# EAGLE board ATtiny RGB LED driver (EAGLE 7.3.0)
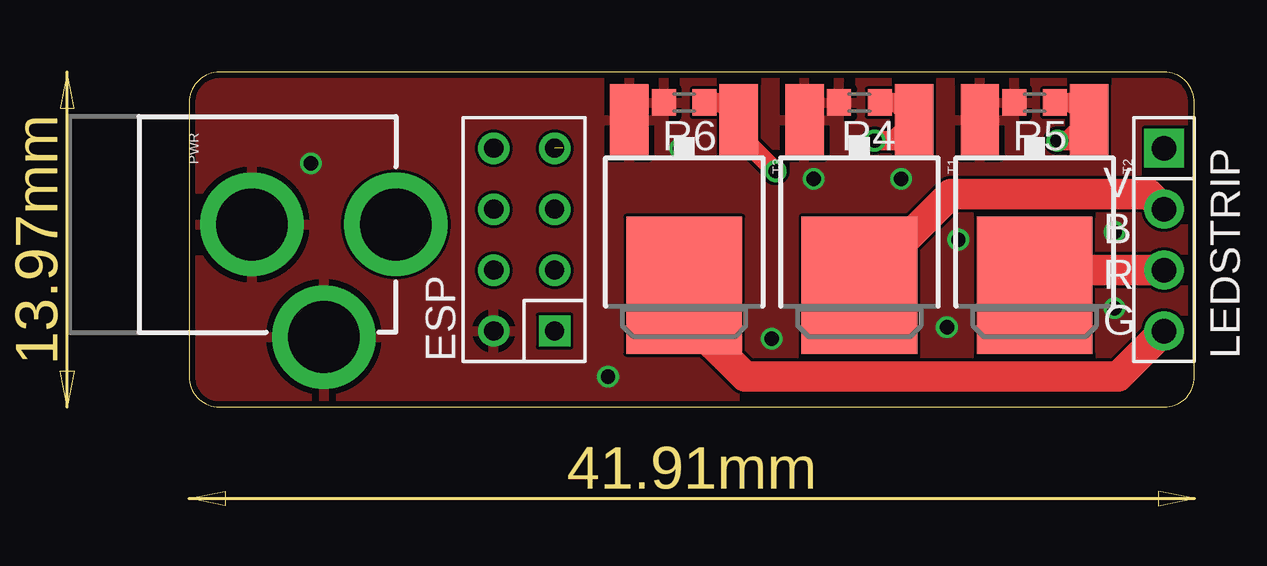
[diagram p0: board, top side]
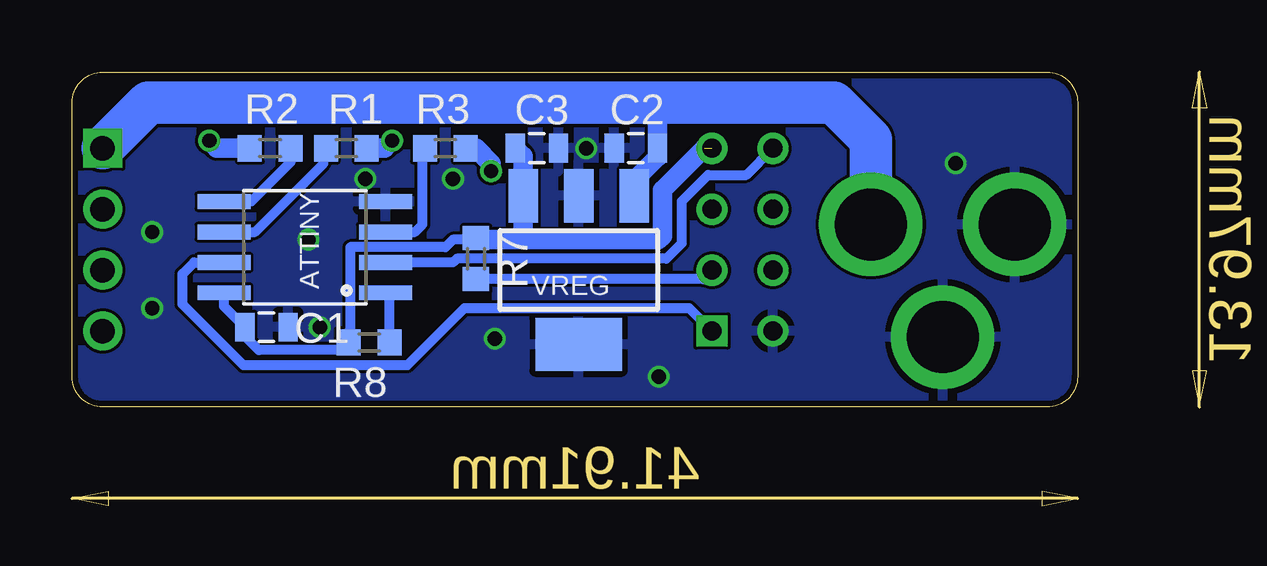
[diagram p1: board, bottom side, seen from below]

Size 41.91 x 13.97 mm. Coordinates in mm from the lower left corner, seen from the top.
Outline: 0,12.7 0,1.27 arc90 1.27,0 40.64,0 arc90 41.91,1.27 41.91,12.7 arc90 40.64,13.97 1.27,13.97 arc90 0,12.7
Copper layers (1*16): Top 0.035mm / dielectric 1.5mm / Bottom 0.035mm
Design rules "dirt_cheap_dirty_boards.v1": minimum track width 5mil, minimum drill 12mil, track to track 5mil, track to pad 5mil, pad to pad 5mil, via to via 5mil, smd to smd 0mil, copper to edge 10mil, drill to drill 10mil, minimum pad ring 10mil, minimum via ring 6mil, stop-mask expansion 2mil, vias tented up to drill 25mil, thermal gap 10mil

## Footprints (pad centres in the part's own frame; a part is rotated, then mirrored left to right if it is on the bottom)
SO08-EIAJ = smd 0.61 x 2.21: 1 -1.905,-3.378; 2 -0.635,-3.378; 3 0.635,-3.378; 4 1.905,-3.378; 5 1.905,3.353; 6 0.635,3.353; 7 -0.635,3.353; 8 -1.905,3.353
0805 = smd 0.8 x 1.2: 1 -0.9,0; 2 0.9,0
M2X4 = drill 0.8 square: 1 -3.81,-1.27 | drill 0.8: 2 -3.81,1.27; 3 -1.27,-1.27; 4 -1.27,1.27; 5 1.27,-1.27; 6 1.27,1.27; 7 3.81,-1.27; 8 3.81,1.27
M1X4 = drill 1.02 pad 1.632 square: 1 0,0 | drill 1.02 pad 1.632: 2 2.54,0; 3 5.08,0; 4 7.62,0
POWER_JACK_PTH = drill 2.997 pad 4.318: GND 0,7.7; GNDBREAK 4.7,10.7; PWR 0,13.7
R603 = smd 1 x 1.1: 1 -0.85,0; 2 0.85,0
DPAK = smd 1.6 x 3: 1 -2.28,-5.31; 3 2.28,-5.31 | smd 4.826 x 5.715: 4 0,1.588
SOT223 = smd 1.219 x 2.235: 1 -2.311,-3.099; 2 0,-3.099; 3 2.311,-3.099 | smd 3.6 x 2.2: 4 0,3.099

## Placement (x,y rotation side)
ATTINY  [SO08-EIAJ]  32.23,6.67 90 bottom
C1  100nF  [0805]  33.81,3.33 180 bottom
C2  10uF  [0805]  18.41,10.79 180 bottom
C3  10uF  [0805]  22.54,10.79 0 bottom
ESP  CON_HEADER_2X04-PTH  [M2X4]  13.97,6.99 90 top
LEDSTRIP  12vBRG  [M1X4]  40.64,10.79 270 top
PWR  [POWER_JACK_PTH]  -5.08,7.62 270 top
R1  1k  [R603]  30.48,10.79 0 bottom
R2  1k  [R603]  33.66,10.79 180 bottom
R3  1k  [R603]  26.35,10.79 0 bottom
R4  [R603]  27.94,12.7 0 top
R5  [R603]  35.24,12.7 0 top
R6  [R603]  20.64,12.7 0 top
R7  10k  [R603]  25.08,6.19 90 bottom
R8  10k  [R603]  29.53,2.7 180 bottom
T1  [DPAK]  27.94,6.67 180 top
T2  [DPAK]  35.24,6.67 180 top
T3  [DPAK]  20.64,6.67 180 top
VREG  TS2940  [SOT223]  20.8,5.71 180 bottom

## Library data of the parts
ATTINY = SparkFun-DigitalIC; PROD_ID: IC-09092
C1-C3 = SparkFun-Passives
ESP LEDSTRIP R1-R8 = dp_devices
PWR = SparkFun-Connectors; PROD_ID: CONN-08197
T1-T3 = SparkFun-DiscreteSemi; PROD_ID: TRANS-09984
VREG = SparkFun-PowerIC

## Nets
3.3V: ATTINY.8 C1.2 C3.1 ESP.7 R7.2 R8.2 VREG.3
12V: C2.1 LEDSTRIP.1 PWR.PWR VREG.1
B: ATTINY.6 R1.1
CHPD: ESP.3 R7.1
G: ATTINY.3 R3.1
GND: ATTINY.4 C1.1 C2.2 C3.2 ESP.2 PWR.GND PWR.GNDBREAK R4.1 R5.1 R6.1 T1.3 T2.3 T3.3 VREG.2 VREG.4
GPIO0: ESP.6
GPIO2: ESP.4
N$1: R1.2 R4.2 T1.1
N$2: R2.2 R5.2 T2.1
N$3: R3.2 R6.2 T3.1
N$4: LEDSTRIP.2 T1.4
N$5: LEDSTRIP.3 T2.4
N$6: LEDSTRIP.4 T3.4
N$7: ATTINY.1 R8.1
R: ATTINY.5 R2.1
RST: ESP.5
RX: ATTINY.2 ESP.8
TX: ATTINY.7 ESP.1

## Tracks (layer width: path | path; a pad name or v marks a point on that pad's centre or on a via)
3.3V  (1 unrouted)
  Bottom 0.406: 25.03,6.99 26.04,6.99 26.35,6.67 30.32,6.67 30.32,3.39 R8.2 30.7,2.38 34.13,2.38 34.71,2.96 C1.2 35.58,4.2 ATTINY.8
  Bottom 0.813: 15.56,10.79 17.3,9.05 17.3,7.14 17.46,6.99 22.86,6.99 | C3.1 23.11,10.46 VREG.3 23.11,7.23 22.86,6.99 | 22.86,6.99 25.03,6.99 R7.2
12V
  Bottom 0.813: 17.62,12.7 17.52,12.59 C2.1 17.52,10.43 18.48,9.46 VREG.1
  Bottom 1.778: LEDSTRIP.1 38.73,12.7 17.62,12.7 10.16,12.7 8.62,11.16 PWR.PWR
B
  Bottom 0.406: ATTINY.6 34.29,7.3 31.43,10.16 31.43,10.69 R1.1
CHPD
  Bottom 0.406: ESP.3 15.61,5.34 R7.1
G
  Bottom 0.406: ATTINY.3 27.62,7.3 27.3,7.62 27.3,10.69 R3.1
GND  (via drill 0.6)
  other vias: 5.08,10.16 29.69,9.53 26.04,9.53 17.46,1.27 32.07,6.99 20.48,10.79 38.58,4.13 38.58,7.3 24.29,2.86 31.59,3.33
  pour Bottom: 0,13.97 41.91,13.97 41.91,0 0,0
  pour Top: 0,13.97 41.91,13.97 41.91,0 0,0
N$1  (via drill 0.6)
  Top 0.813: R4.2 29.5,12.7 T1.1 29.36,11.11 v28.57,11.11
  Bottom 0.813: v28.57,11.11 28.89,10.79 R1.2
N$2  (via drill 0.6)
  Top 0.813: R5.2 36.8,12.7 T2.1 36.66,11.11 v36.2,11.11
  Bottom 0.813: R2.2 35.88,10.79 v36.2,11.11
N$3  (via drill 0.6)
  Top 0.813: R6.2 22.2,12.7 T3.1 22.92,11.37 v24.45,9.84
  Bottom 0.813: v24.45,9.84 24.45,10.16 25.08,10.79 R3.2
N$4
  Top 1.27: LEDSTRIP.2 40.01,8.89 31.75,8.89 T1.4 | T1.4
N$5
  Top 1.27: LEDSTRIP.3 35.88,5.71 T2.4
N$6
  Top 1.27: LEDSTRIP.4 38.73,1.27 23.18,1.27 20.64,3.81 T3.4
N$7
  Bottom 0.406: R8.1 28.68,4.59 ATTINY.1
R
  Bottom 0.406: R2.1 32.8,10.22 34.45,8.57 35.56,8.59 ATTINY.5
RX
  Bottom 0.406: ESP.8 13.81,9.68 15.4,9.68 16.51,8.57 16.51,6.83 17.14,6.19 25.88,6.19 26.04,6.03 ATTINY.2
TX
  Bottom 0.406: ESP.1 16.19,4.13 25.56,4.13 27.94,1.75 34.77,1.75 37.31,4.29 37.31,5.56 36.83,6.03 ATTINY.7

## Text on the board
tNames: V / B / R / G